# Altium PCB 2led_v2.PcbDoc (part 2 of 2)
Units mm, origin at the board's own origin, x right, y up, seen from the top; angles counter-clockwise.
Board outline 100 x 100 mm, 2 copper layers (Top Layer, Bottom Layer); 180 components, 8 nets, 419 pads, 0 vias.
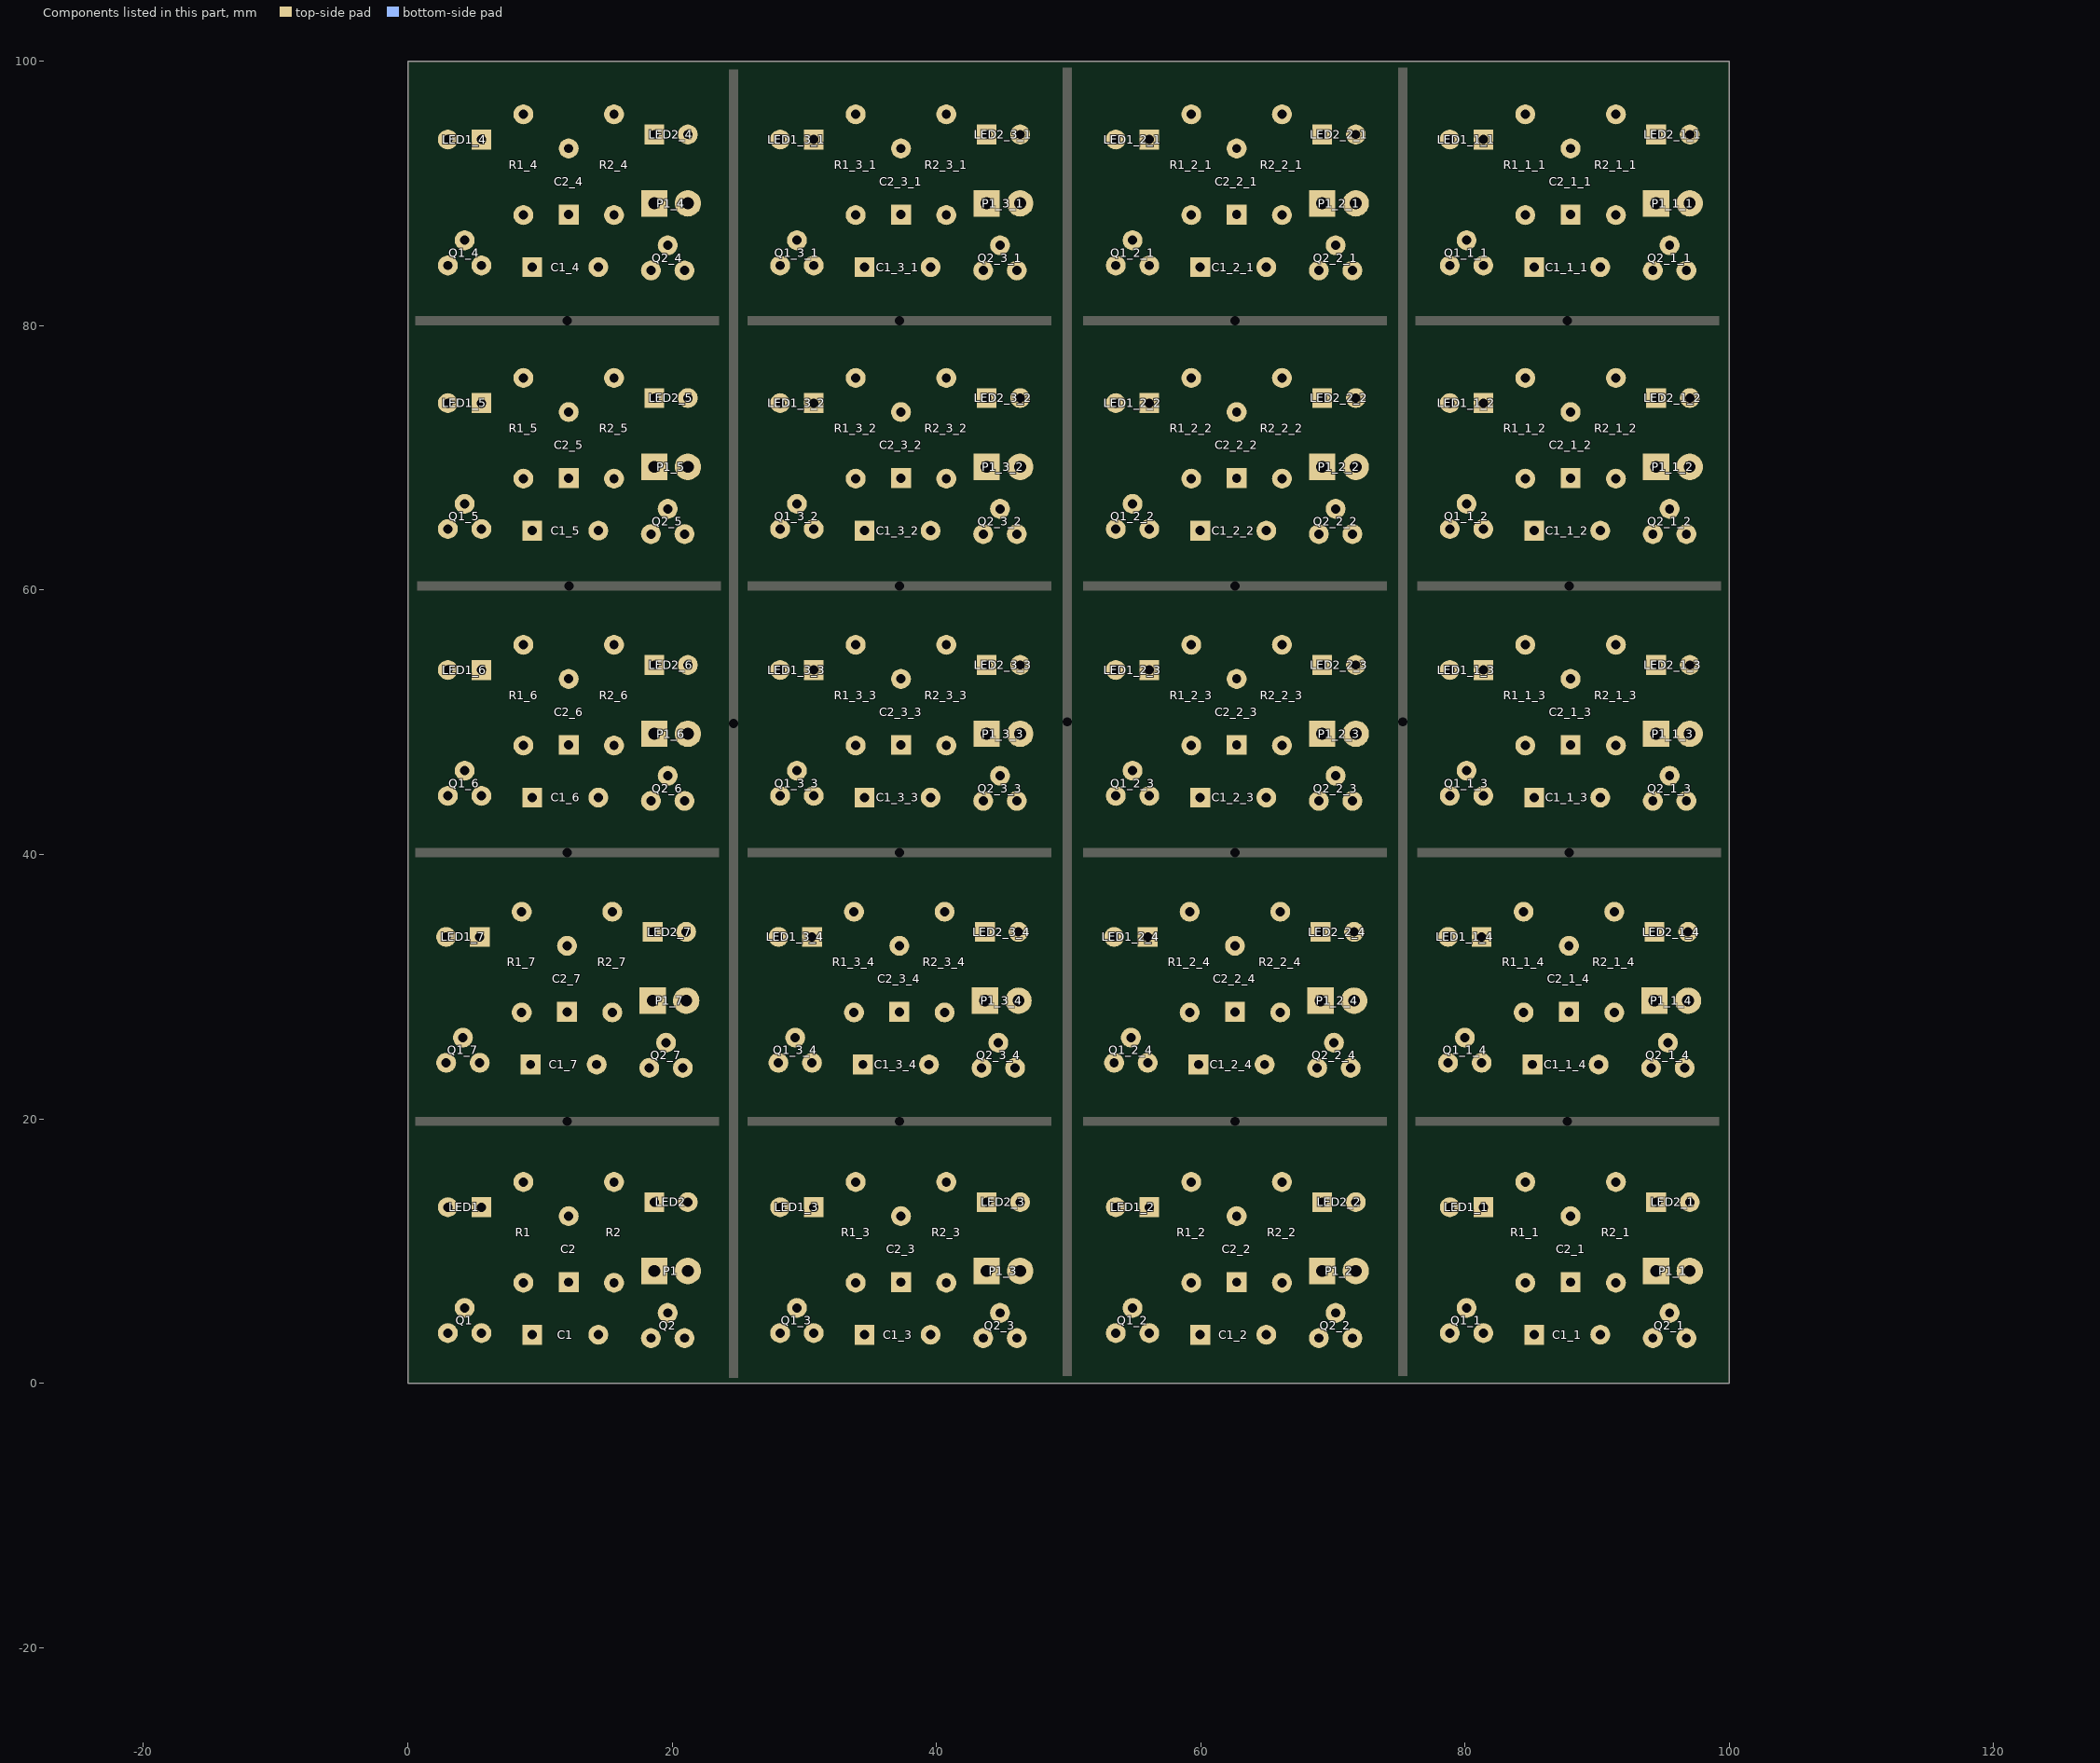
[diagram p2: the components of this part, seen from the top]

## Nets (pads, with @x,y where several pads share a name; then routed paths per layer and width w, separated by ;. In a path a pad name is that pad's centre, name@x,y a point inside that pad or via, vN(x,y) a via of type N, cw(c..) or ccw(c..) an arc to the next point about the centre after c; other vN are vias at no path point) (continued)
copper on no net: | length 2033.3
  Top Layer w0.254: -9.287,-24.4 -9.16,-24.4
  Top Layer w0.762: 5.445,24.241 6.588,24.241 8.747,22.082 19.034,22.082 20.812,23.86 ; 5.572,44.434 6.715,44.434 8.874,42.275 19.161,42.275 20.939,44.053 ; 5.572,64.627 6.715,64.627 8.874,62.468 19.161,62.468 20.939,64.246 ; 5.572,84.566 6.715,84.566 8.874,82.407 19.161,82.407 20.939,84.185 ; 12.049,28.091 12.898,28.091 17.129,23.86 18.272,23.86 ; 12.176,48.284 13.025,48.284 17.256,44.053 18.399,44.053 ; 12.176,68.477 13.025,68.477 17.256,64.246 18.399,64.246 ; 12.176,88.416 13.025,88.416 17.256,84.185 18.399,84.185 ; 30.591,24.241 31.734,24.241 33.893,22.082 44.18,22.082 45.958,23.86 ; 30.718,3.794 31.861,3.794 34.02,1.635 44.307,1.635 46.085,3.413 ; 30.718,44.434 31.861,44.434 34.02,42.275 44.307,42.275 46.085,44.053 ; 30.718,64.627 31.861,64.627 34.02,62.468 44.307,62.468 46.085,64.246 ; 30.718,84.566 31.861,84.566 34.02,82.407 44.307,82.407 46.085,84.185 ; 37.195,28.091 38.044,28.091 42.275,23.86 43.418,23.86 ; 37.322,7.644 38.171,7.644 42.402,3.413 43.545,3.413 ; 37.322,48.284 38.171,48.284 42.402,44.053 43.545,44.053 ; 37.322,68.477 38.171,68.477 42.402,64.246 43.545,64.246 ; 37.322,88.416 38.171,88.416 42.402,84.185 43.545,84.185 ; 55.991,24.241 57.134,24.241 59.293,22.082 69.58,22.082 71.358,23.86 ; 56.118,3.794 57.261,3.794 59.42,1.635 69.707,1.635 71.485,3.413 ; 56.118,44.434 57.261,44.434 59.42,42.275 69.707,42.275 71.485,44.053 ; 56.118,64.627 57.261,64.627 59.42,62.468 69.707,62.468 71.485,64.246 ; 56.118,84.566 57.261,84.566 59.42,82.407 69.707,82.407 71.485,84.185 ; 62.595,28.091 63.444,28.091 67.675,23.86 68.818,23.86 ; 62.722,7.644 63.571,7.644 67.802,3.413 68.945,3.413 ; 62.722,48.284 63.571,48.284 67.802,44.053 68.945,44.053 ; 62.722,68.477 63.571,68.477 67.802,64.246 68.945,64.246 ; 62.722,88.416 63.571,88.416 67.802,84.185 68.945,84.185 ; 81.264,24.241 82.407,24.241 84.566,22.082 94.853,22.082 96.631,23.86 ; 81.391,3.794 82.534,3.794 84.693,1.635 94.98,1.635 96.758,3.413 ; 81.391,44.434 82.534,44.434 84.693,42.275 94.98,42.275 96.758,44.053 ; 81.391,64.627 82.534,64.627 84.693,62.468 94.98,62.468 96.758,64.246 ; 81.391,84.566 82.534,84.566 84.693,82.407 94.98,82.407 96.758,84.185 ; 87.868,28.091 88.717,28.091 92.948,23.86 94.091,23.86 ; 87.995,7.644 88.844,7.644 93.075,3.413 94.218,3.413 ; 87.995,48.284 88.844,48.284 93.075,44.053 94.218,44.053 ; 87.995,68.477 88.844,68.477 93.075,64.246 94.218,64.246 ; 87.995,88.416 88.844,88.416 93.075,84.185 94.218,84.185
  Bottom Layer w0.762: 2.905,33.766 2.905,28.813 2.016,27.924 2.016,25.13 2.905,24.241 4.429,22.717 8.112,22.717 9.295,23.9 9.295,24.114 ; 3.032,53.959 3.032,49.006 2.143,48.117 2.143,45.323 3.032,44.434 4.556,42.91 8.239,42.91 9.422,44.093 9.422,44.307 ; 3.032,74.152 3.032,69.199 2.143,68.31 2.143,65.516 3.032,64.627 4.556,63.103 8.239,63.103 9.422,64.286 9.422,64.5 ; 3.032,94.091 3.032,89.138 2.143,88.249 2.143,85.455 3.032,84.566 4.556,83.042 8.239,83.042 9.422,84.225 9.422,84.439 ; 4.175,26.146 6.715,26.146 8.62,28.051 12.049,31.48 12.049,33.091 ; 4.302,46.339 6.842,46.339 8.747,48.244 12.176,51.673 12.176,53.284 ; 4.302,66.532 6.842,66.532 8.747,68.437 12.176,71.866 12.176,73.477 ; 4.302,86.471 6.842,86.471 8.747,88.376 12.176,91.805 12.176,93.416 ; 5.445,33.766 6.715,33.766 8.62,35.671 15.478,35.671 17.002,35.671 18.526,34.147 18.526,28.94 ; 5.572,53.959 6.842,53.959 8.747,55.864 15.605,55.864 17.129,55.864 18.653,54.34 18.653,49.133 ; 5.572,74.152 6.842,74.152 8.747,76.057 15.605,76.057 17.129,76.057 18.653,74.533 18.653,69.326 ; 5.572,94.091 6.842,94.091 8.747,95.996 15.605,95.996 17.129,95.996 18.653,94.472 18.653,89.265 ; 14.295,24.114 14.295,26.868 15.478,28.051 15.605,28.051 17.891,25.765 19.542,25.765 ; 14.422,44.307 14.422,47.061 15.605,48.244 15.732,48.244 18.018,45.958 19.669,45.958 ; 14.422,64.5 14.422,67.254 15.605,68.437 15.732,68.437 18.018,66.151 19.669,66.151 ; 14.422,84.439 14.422,87.193 15.605,88.376 15.732,88.376 18.018,86.09 19.669,86.09 ; 18.272,23.86 20.304,21.828 22.082,21.828 22.844,22.59 22.844,30.21 21.066,31.988 21.066,34.147 ; 18.399,44.053 20.431,42.021 22.209,42.021 22.971,42.783 22.971,50.403 21.193,52.181 21.193,54.34 ; 18.399,64.246 20.431,62.214 22.209,62.214 22.971,62.976 22.971,70.596 21.193,72.374 21.193,74.533 ; 18.399,84.185 20.431,82.153 22.209,82.153 22.971,82.915 22.971,90.535 21.193,92.313 21.193,94.472 ; 20.812,23.86 21.066,24.114 21.066,28.94 ; 20.939,44.053 21.193,44.307 21.193,49.133 ; 20.939,64.246 21.193,64.5 21.193,69.326 ; 20.939,84.185 21.193,84.439 21.193,89.265 ; 28.051,33.766 28.051,28.813 27.162,27.924 27.162,25.13 28.051,24.241 29.575,22.717 33.258,22.717 34.441,23.9 34.441,24.114 ; 28.178,13.319 28.178,8.366 27.289,7.477 27.289,4.683 28.178,3.794 29.702,2.27 33.385,2.27 34.568,3.453 34.568,3.667 ; 28.178,53.959 28.178,49.006 27.289,48.117 27.289,45.323 28.178,44.434 29.702,42.91 33.385,42.91 34.568,44.093 34.568,44.307 ; 28.178,74.152 28.178,69.199 27.289,68.31 27.289,65.516 28.178,64.627 29.702,63.103 33.385,63.103 34.568,64.286 34.568,64.5 ; 28.178,94.091 28.178,89.138 27.289,88.249 27.289,85.455 28.178,84.566 29.702,83.042 33.385,83.042 34.568,84.225 34.568,84.439 ; 29.321,26.146 31.861,26.146 33.766,28.051 37.195,31.48 37.195,33.091 ; 29.448,5.699 31.988,5.699 33.893,7.604 37.322,11.033 37.322,12.644 ; 29.448,46.339 31.988,46.339 33.893,48.244 37.322,51.673 37.322,53.284 ; 29.448,66.532 31.988,66.532 33.893,68.437 37.322,71.866 37.322,73.477 ; 29.448,86.471 31.988,86.471 33.893,88.376 37.322,91.805 37.322,93.416 ; 30.591,33.766 31.861,33.766 33.766,35.671 40.624,35.671 42.148,35.671 43.672,34.147 43.672,28.94 ; 30.718,13.319 31.988,13.319 33.893,15.224 40.751,15.224 42.275,15.224 43.799,13.7 43.799,8.493 ; 30.718,53.959 31.988,53.959 33.893,55.864 40.751,55.864 42.275,55.864 43.799,54.34 43.799,49.133 ; 30.718,74.152 31.988,74.152 33.893,76.057 40.751,76.057 42.275,76.057 43.799,74.533 43.799,69.326 ; 30.718,94.091 31.988,94.091 33.893,95.996 40.751,95.996 42.275,95.996 43.799,94.472 43.799,89.265 ; 39.441,24.114 39.441,26.868 40.624,28.051 40.751,28.051 43.037,25.765 44.688,25.765 ; 39.568,3.667 39.568,6.421 40.751,7.604 40.878,7.604 43.164,5.318 44.815,5.318 ; 39.568,44.307 39.568,47.061 40.751,48.244 40.878,48.244 43.164,45.958 44.815,45.958 ; 39.568,64.5 39.568,67.254 40.751,68.437 40.878,68.437 43.164,66.151 44.815,66.151 ; 39.568,84.439 39.568,87.193 40.751,88.376 40.878,88.376 43.164,86.09 44.815,86.09 ; 43.418,23.86 45.45,21.828 47.228,21.828 47.99,22.59 47.99,30.21 46.212,31.988 46.212,34.147 ; 43.545,3.413 45.577,1.381 47.355,1.381 48.117,2.143 48.117,9.763 46.339,11.541 46.339,13.7 ; 43.545,44.053 45.577,42.021 47.355,42.021 48.117,42.783 48.117,50.403 46.339,52.181 46.339,54.34 ; 43.545,64.246 45.577,62.214 47.355,62.214 48.117,62.976 48.117,70.596 46.339,72.374 46.339,74.533 ; 43.545,84.185 45.577,82.153 47.355,82.153 48.117,82.915 48.117,90.535 46.339,92.313 46.339,94.472 ; 45.958,23.86 46.212,24.114 46.212,28.94 ; 46.085,3.413 46.339,3.667 46.339,8.493 ; 46.085,44.053 46.339,44.307 46.339,49.133 ; 46.085,64.246 46.339,64.5 46.339,69.326 ; 46.085,84.185 46.339,84.439 46.339,89.265 ; 53.451,33.766 53.451,28.813 52.562,27.924 52.562,25.13 53.451,24.241 54.975,22.717 58.658,22.717 59.841,23.9 59.841,24.114 ; 53.578,13.319 53.578,8.366 52.689,7.477 52.689,4.683 53.578,3.794 55.102,2.27 58.785,2.27 59.968,3.453 59.968,3.667 ; 53.578,53.959 53.578,49.006 52.689,48.117 52.689,45.323 53.578,44.434 55.102,42.91 58.785,42.91 59.968,44.093 59.968,44.307 ; 53.578,74.152 53.578,69.199 52.689,68.31 52.689,65.516 53.578,64.627 55.102,63.103 58.785,63.103 59.968,64.286 59.968,64.5 ; 53.578,94.091 53.578,89.138 52.689,88.249 52.689,85.455 53.578,84.566 55.102,83.042 58.785,83.042 59.968,84.225 59.968,84.439 ; 54.721,26.146 57.261,26.146 59.166,28.051 62.595,31.48 62.595,33.091 ; 54.848,5.699 57.388,5.699 59.293,7.604 62.722,11.033 62.722,12.644 ; 54.848,46.339 57.388,46.339 59.293,48.244 62.722,51.673 62.722,53.284 ; 54.848,66.532 57.388,66.532 59.293,68.437 62.722,71.866 62.722,73.477 ; 54.848,86.471 57.388,86.471 59.293,88.376 62.722,91.805 62.722,93.416 ; 55.991,33.766 57.261,33.766 59.166,35.671 66.024,35.671 67.548,35.671 69.072,34.147 69.072,28.94 ; 56.118,13.319 57.388,13.319 59.293,15.224 66.151,15.224 67.675,15.224 69.199,13.7 69.199,8.493 ; 56.118,53.959 57.388,53.959 59.293,55.864 66.151,55.864 67.675,55.864 69.199,54.34 69.199,49.133 ; 56.118,74.152 57.388,74.152 59.293,76.057 66.151,76.057 67.675,76.057 69.199,74.533 69.199,69.326 ; 56.118,94.091 57.388,94.091 59.293,95.996 66.151,95.996 67.675,95.996 69.199,94.472 69.199,89.265 ; 64.841,24.114 64.841,26.868 66.024,28.051 66.151,28.051 68.437,25.765 70.088,25.765 ; 64.968,3.667 64.968,6.421 66.151,7.604 66.278,7.604 68.564,5.318 70.215,5.318 ; 64.968,44.307 64.968,47.061 66.151,48.244 66.278,48.244 68.564,45.958 70.215,45.958 ; 64.968,64.5 64.968,67.254 66.151,68.437 66.278,68.437 68.564,66.151 70.215,66.151 ; 64.968,84.439 64.968,87.193 66.151,88.376 66.278,88.376 68.564,86.09 70.215,86.09 ; 68.818,23.86 70.85,21.828 72.628,21.828 73.39,22.59 73.39,30.21 71.612,31.988 71.612,34.147 ; 68.945,3.413 70.977,1.381 72.755,1.381 73.517,2.143 73.517,9.763 71.739,11.541 71.739,13.7 ; 68.945,44.053 70.977,42.021 72.755,42.021 73.517,42.783 73.517,50.403 71.739,52.181 71.739,54.34 ; 68.945,64.246 70.977,62.214 72.755,62.214 73.517,62.976 73.517,70.596 71.739,72.374 71.739,74.533 ; 68.945,84.185 70.977,82.153 72.755,82.153 73.517,82.915 73.517,90.535 71.739,92.313 71.739,94.472 ; 71.358,23.86 71.612,24.114 71.612,28.94 ; 71.485,3.413 71.739,3.667 71.739,8.493 ; 71.485,44.053 71.739,44.307 71.739,49.133 ; 71.485,64.246 71.739,64.5 71.739,69.326 ; 71.485,84.185 71.739,84.439 71.739,89.265 ; 78.724,33.766 78.724,28.813 77.835,27.924 77.835,25.13 78.724,24.241 80.248,22.717 83.931,22.717 85.114,23.9 85.114,24.114 ; 78.851,13.319 78.851,8.366 77.962,7.477 77.962,4.683 78.851,3.794 80.375,2.27 84.058,2.27 85.241,3.453 85.241,3.667 ; 78.851,53.959 78.851,49.006 77.962,48.117 77.962,45.323 78.851,44.434 80.375,42.91 84.058,42.91 85.241,44.093 85.241,44.307 ; 78.851,74.152 78.851,69.199 77.962,68.31 77.962,65.516 78.851,64.627 80.375,63.103 84.058,63.103 85.241,64.286 85.241,64.5 ; 78.851,94.091 78.851,89.138 77.962,88.249 77.962,85.455 78.851,84.566 80.375,83.042 84.058,83.042 85.241,84.225 85.241,84.439 ; 79.994,26.146 82.534,26.146 84.439,28.051 87.868,31.48 87.868,33.091 ; 80.121,5.699 82.661,5.699 84.566,7.604 87.995,11.033 87.995,12.644 ; 80.121,46.339 82.661,46.339 84.566,48.244 87.995,51.673 87.995,53.284 ; 80.121,66.532 82.661,66.532 84.566,68.437 87.995,71.866 87.995,73.477 ; 80.121,86.471 82.661,86.471 84.566,88.376 87.995,91.805 87.995,93.416 ; 81.264,33.766 82.534,33.766 84.439,35.671 91.297,35.671 92.821,35.671 94.345,34.147 94.345,28.94 ; 81.391,13.319 82.661,13.319 84.566,15.224 91.424,15.224 92.948,15.224 94.472,13.7 94.472,8.493 ; 81.391,53.959 82.661,53.959 84.566,55.864 91.424,55.864 92.948,55.864 94.472,54.34 94.472,49.133 ; 81.391,74.152 82.661,74.152 84.566,76.057 91.424,76.057 92.948,76.057 94.472,74.533 94.472,69.326 ; 81.391,94.091 82.661,94.091 84.566,95.996 91.424,95.996 92.948,95.996 94.472,94.472 94.472,89.265 ; 90.114,24.114 90.114,26.868 91.297,28.051 91.424,28.051 93.71,25.765 95.361,25.765 ; 90.241,3.667 90.241,6.421 91.424,7.604 91.551,7.604 93.837,5.318 95.488,5.318 ; 90.241,44.307 90.241,47.061 91.424,48.244 91.551,48.244 93.837,45.958 95.488,45.958 ; 90.241,64.5 90.241,67.254 91.424,68.437 91.551,68.437 93.837,66.151 95.488,66.151 ; 90.241,84.439 90.241,87.193 91.424,88.376 91.551,88.376 93.837,86.09 95.488,86.09 ; 94.091,23.86 96.123,21.828 97.901,21.828 98.663,22.59 98.663,30.21 96.885,31.988 96.885,34.147 ; 94.218,3.413 96.25,1.381 98.028,1.381 98.79,2.143 98.79,9.763 97.012,11.541 97.012,13.7 ; 94.218,44.053 96.25,42.021 98.028,42.021 98.79,42.783 98.79,50.403 97.012,52.181 97.012,54.34 ; 94.218,64.246 96.25,62.214 98.028,62.214 98.79,62.976 98.79,70.596 97.012,72.374 97.012,74.533 ; 94.218,84.185 96.25,82.153 98.028,82.153 98.79,82.915 98.79,90.535 97.012,92.313 97.012,94.472 ; 96.631,23.86 96.885,24.114 96.885,28.94 ; 96.758,3.413 97.012,3.667 97.012,8.493 ; 96.758,44.053 97.012,44.307 97.012,49.133 ; 96.758,64.246 97.012,64.5 97.012,69.326 ; 96.758,84.185 97.012,84.439 97.012,89.265

## Keep-outs
Keep-Out Layer:
  lines w0.254: 0,0 100.076,0 100.076,100.203 0,100.203 0,0

## Silkscreen, mask and mechanical layers (free items; w line width, h text height)
Top Overlay:
  lines w0.254: 0.238,20.812 0.238,39.227 23.733,39.227 23.733,20.812 0.238,20.812 ; 0.365,0.365 23.86,0.365 23.86,18.78 0.365,18.78 0.365,0.365 ; 0.365,41.005 0.365,59.42 23.86,59.42 23.86,41.005 0.365,41.005 ; 0.365,61.198 0.365,79.613 23.86,79.613 23.86,61.198 0.365,61.198 ; 0.365,81.137 0.365,99.552 23.86,99.552 23.86,81.137 0.365,81.137 ; 25.384,20.812 48.879,20.812 48.879,39.227 25.384,39.227 25.384,20.812 ; 25.511,0.365 25.511,18.78 49.006,18.78 49.006,0.365 25.511,0.365 ; 25.511,41.005 49.006,41.005 49.006,59.42 25.511,59.42 25.511,41.005 ; 25.511,61.198 49.006,61.198 49.006,79.613 25.511,79.613 25.511,61.198 ; 25.511,81.137 49.006,81.137 49.006,99.552 25.511,99.552 25.511,81.137 ; 50.784,20.812 74.279,20.812 74.279,39.227 50.784,39.227 50.784,20.812 ; 50.911,0.365 50.911,18.78 74.406,18.78 74.406,0.365 50.911,0.365 ; 50.911,41.005 74.406,41.005 74.406,59.42 50.911,59.42 50.911,41.005 ; 50.911,61.198 74.406,61.198 74.406,79.613 50.911,79.613 50.911,61.198 ; 50.911,81.137 74.406,81.137 74.406,99.552 50.911,99.552 50.911,81.137 ; 76.057,20.812 99.552,20.812 99.552,39.227 76.057,39.227 76.057,20.812 ; 76.184,0.365 76.184,18.78 99.679,18.78 99.679,0.365 76.184,0.365 ; 76.184,41.005 99.679,41.005 99.679,59.42 76.184,59.42 76.184,41.005 ; 76.184,61.198 99.679,61.198 99.679,79.613 76.184,79.613 76.184,61.198 ; 76.184,81.137 99.679,81.137 99.679,99.552 76.184,99.552 76.184,81.137
  text "LED" at 18.907,97.901 h1
  text "LED" at 44.053,97.901 h1
  text "LED" at 69.453,97.901 h1
  text "LED" at 94.726,97.901 h1
  text "A.I. PCB" at 8.874,97.647 h1
  text "A.I. PCB" at 34.02,97.647 h1
  text "A.I. PCB" at 59.42,97.647 h1
  text "A.I. PCB" at 84.693,97.647 h1
  text "LED" at 2.778,97.52 h1
  text "LED" at 27.924,97.52 h1
  text "LED" at 53.324,97.52 h1
  text "LED" at 78.597,97.52 h1
  text "+" at 18.399,95.615 h1
  text "+" at 43.545,95.615 h1
  text "+" at 68.945,95.615 h1
  text "+" at 94.218,95.615 h1
  text "-" at 20.812,95.488 h1
  text "-" at 45.958,95.488 h1
  text "-" at 71.358,95.488 h1
  text "-" at 96.631,95.488 h1
  text "+" at 5.191,95.107 h1
  text "+" at 30.337,95.107 h1
  text "+" at 55.737,95.107 h1
  text "+" at 81.01,95.107 h1
  text "-" at 3.413,94.98 h1
  text "-" at 28.559,94.98 h1
  text "-" at 53.959,94.98 h1
  text "-" at 79.232,94.98 h1
  text "-" at 11.668,91.932 h1
  text "-" at 36.814,91.932 h1
  text "-" at 62.214,91.932 h1
  text "-" at 87.487,91.932 h1
  text "33K" at 16.113,91.424 h1 r90
  text "33K" at 41.259,91.424 h1 r90
  text "33K" at 66.659,91.424 h1 r90
  text "33K" at 91.932,91.424 h1 r90
  text "33K" at 9.255,91.043 h1 r90
  text "33K" at 34.401,91.043 h1 r90
  text "33K" at 59.801,91.043 h1 r90
  text "33K" at 85.074,91.043 h1 r90
  text "+" at 17.51,90.662 h1
  text "+" at 42.656,90.662 h1
  text "+" at 68.056,90.662 h1
  text "+" at 93.329,90.662 h1
  text "100U" at 10.779,90.535 h0.8
  text "100U" at 35.925,90.535 h0.8
  text "100U" at 61.325,90.535 h0.8
  text "100U" at 86.598,90.535 h0.8
  text "-" at 21.193,90.408 h1
  text "-" at 46.339,90.408 h1
  text "-" at 71.739,90.408 h1
  text "-" at 97.012,90.408 h1
  text "+" at 11.922,89.265 h1
  text "+" at 37.068,89.265 h1
  text "+" at 62.468,89.265 h1
  text "+" at 87.741,89.265 h1
  text "3V" at 21.574,86.598 h1
  text "3V" at 46.72,86.598 h1
  text "3V" at 72.12,86.598 h1
  text "3V" at 97.393,86.598 h1
  text "100U" at 10.652,84.82 h0.8
  text "100U" at 35.798,84.82 h0.8
  text "100U" at 61.198,84.82 h0.8
  text "100U" at 86.471,84.82 h0.8
  text "+" at 10.652,83.931 h1
  text "-" at 12.557,83.931 h1
  text "+" at 35.798,83.931 h1
  text "-" at 37.703,83.931 h1
  text "+" at 61.198,83.931 h1
  text "-" at 63.103,83.931 h1
  text "+" at 86.471,83.931 h1
  text "-" at 88.376,83.931 h1
  text "2N2222" at 1.381,81.518 h1
  text "2N2222" at 16.621,81.518 h1
  text "2N2222" at 26.527,81.518 h1
  text "2N2222" at 41.767,81.518 h1
  text "2N2222" at 51.927,81.518 h1
  text "2N2222" at 67.167,81.518 h1
  text "2N2222" at 77.2,81.518 h1
  text "2N2222" at 92.44,81.518 h1
  text "LED" at 18.907,77.962 h1
  text "LED" at 44.053,77.962 h1
  text "LED" at 69.453,77.962 h1
  text "LED" at 94.726,77.962 h1
  text "A.I. PCB" at 8.874,77.708 h1
  text "A.I. PCB" at 34.02,77.708 h1
  text "A.I. PCB" at 59.42,77.708 h1
  text "A.I. PCB" at 84.693,77.708 h1
  text "LED" at 2.778,77.581 h1
  text "LED" at 27.924,77.581 h1
  text "LED" at 53.324,77.581 h1
  text "LED" at 78.597,77.581 h1
  text "+" at 18.399,75.676 h1
  text "+" at 43.545,75.676 h1
  text "+" at 68.945,75.676 h1
  text "+" at 94.218,75.676 h1
  text "-" at 20.812,75.549 h1
  text "-" at 45.958,75.549 h1
  text "-" at 71.358,75.549 h1
  text "-" at 96.631,75.549 h1
  text "+" at 5.191,75.168 h1
  text "+" at 30.337,75.168 h1
  text "+" at 55.737,75.168 h1
  text "+" at 81.01,75.168 h1
  text "-" at 3.413,75.041 h1
  text "-" at 28.559,75.041 h1
  text "-" at 53.959,75.041 h1
  text "-" at 79.232,75.041 h1
  text "-" at 11.668,71.993 h1
  text "-" at 36.814,71.993 h1
  text "-" at 62.214,71.993 h1
  text "-" at 87.487,71.993 h1
  text "33K" at 16.113,71.485 h1 r90
  text "33K" at 41.259,71.485 h1 r90
  text "33K" at 66.659,71.485 h1 r90
  text "33K" at 91.932,71.485 h1 r90
  text "33K" at 9.255,71.104 h1 r90
  text "33K" at 34.401,71.104 h1 r90
  text "33K" at 59.801,71.104 h1 r90
  text "33K" at 85.074,71.104 h1 r90
  text "+" at 17.51,70.723 h1
  text "+" at 42.656,70.723 h1
  text "+" at 68.056,70.723 h1
  text "+" at 93.329,70.723 h1
  text "100U" at 10.779,70.596 h0.8
  text "100U" at 35.925,70.596 h0.8
  text "100U" at 61.325,70.596 h0.8
  text "100U" at 86.598,70.596 h0.8
  text "-" at 21.193,70.469 h1
  text "-" at 46.339,70.469 h1
  text "-" at 71.739,70.469 h1
  text "-" at 97.012,70.469 h1
  text "+" at 11.922,69.326 h1
  text "+" at 37.068,69.326 h1
  text "+" at 62.468,69.326 h1
  text "+" at 87.741,69.326 h1
  text "3V" at 21.574,66.659 h1
  text "3V" at 46.72,66.659 h1
  text "3V" at 72.12,66.659 h1
  text "3V" at 97.393,66.659 h1
  text "100U" at 10.652,64.881 h0.8
  text "100U" at 35.798,64.881 h0.8
  text "100U" at 61.198,64.881 h0.8
  text "100U" at 86.471,64.881 h0.8
  text "+" at 10.652,63.992 h1
  text "-" at 12.557,63.992 h1
  text "+" at 35.798,63.992 h1
  text "-" at 37.703,63.992 h1
  text "+" at 61.198,63.992 h1
  text "-" at 63.103,63.992 h1
  text "+" at 86.471,63.992 h1
  text "-" at 88.376,63.992 h1
  text "2N2222" at 1.381,61.579 h1
  text "2N2222" at 16.621,61.579 h1
  text "2N2222" at 26.527,61.579 h1
  text "2N2222" at 41.767,61.579 h1
  text "2N2222" at 51.927,61.579 h1
  text "2N2222" at 67.167,61.579 h1
  text "2N2222" at 77.2,61.579 h1
  text "2N2222" at 92.44,61.579 h1
  text "LED" at 18.907,57.769 h1
  text "LED" at 44.053,57.769 h1
  text "LED" at 69.453,57.769 h1
  text "LED" at 94.726,57.769 h1
  text "A.I. PCB" at 8.874,57.515 h1
  text "A.I. PCB" at 34.02,57.515 h1
  text "A.I. PCB" at 59.42,57.515 h1
  text "A.I. PCB" at 84.693,57.515 h1
  text "LED" at 2.778,57.388 h1
  text "LED" at 27.924,57.388 h1
  text "LED" at 53.324,57.388 h1
  text "LED" at 78.597,57.388 h1
  text "+" at 18.399,55.483 h1
  text "+" at 43.545,55.483 h1
  text "+" at 68.945,55.483 h1
  text "+" at 94.218,55.483 h1
  text "-" at 20.812,55.356 h1
  text "-" at 45.958,55.356 h1
  text "-" at 71.358,55.356 h1
  text "-" at 96.631,55.356 h1
  text "+" at 5.191,54.975 h1
  text "+" at 30.337,54.975 h1
  text "+" at 55.737,54.975 h1
  text "+" at 81.01,54.975 h1
  text "-" at 3.413,54.848 h1
  text "-" at 28.559,54.848 h1
  text "-" at 53.959,54.848 h1
  text "-" at 79.232,54.848 h1
  text "-" at 11.668,51.8 h1
  text "-" at 36.814,51.8 h1
  text "-" at 62.214,51.8 h1
  text "-" at 87.487,51.8 h1
  text "33K" at 16.113,51.292 h1 r90
  text "33K" at 41.259,51.292 h1 r90
  text "33K" at 66.659,51.292 h1 r90
  text "33K" at 91.932,51.292 h1 r90
  text "33K" at 9.255,50.911 h1 r90
  text "33K" at 34.401,50.911 h1 r90
  text "33K" at 59.801,50.911 h1 r90
  text "33K" at 85.074,50.911 h1 r90
  text "+" at 17.51,50.53 h1
  text "+" at 42.656,50.53 h1
  text "+" at 68.056,50.53 h1
  text "+" at 93.329,50.53 h1
  text "100U" at 10.779,50.403 h0.8
  text "100U" at 35.925,50.403 h0.8
  text "100U" at 61.325,50.403 h0.8
  text "100U" at 86.598,50.403 h0.8
  text "-" at 21.193,50.276 h1
  text "-" at 46.339,50.276 h1
  text "-" at 71.739,50.276 h1
  text "-" at 97.012,50.276 h1
  text "+" at 11.922,49.133 h1
  text "+" at 37.068,49.133 h1
  text "+" at 62.468,49.133 h1
  text "+" at 87.741,49.133 h1
  text "3V" at 21.574,46.466 h1
  text "3V" at 46.72,46.466 h1
  text "3V" at 72.12,46.466 h1
  text "3V" at 97.393,46.466 h1
  text "100U" at 10.652,44.688 h0.8
  text "100U" at 35.798,44.688 h0.8
  text "100U" at 61.198,44.688 h0.8
  text "100U" at 86.471,44.688 h0.8
  text "+" at 10.652,43.799 h1
  text "-" at 12.557,43.799 h1
  text "+" at 35.798,43.799 h1
  text "-" at 37.703,43.799 h1
  text "+" at 61.198,43.799 h1
  text "-" at 63.103,43.799 h1
  text "+" at 86.471,43.799 h1
  text "-" at 88.376,43.799 h1
  text "2N2222" at 1.381,41.386 h1
  text "2N2222" at 16.621,41.386 h1
  text "2N2222" at 26.527,41.386 h1
  text "2N2222" at 41.767,41.386 h1
  text "2N2222" at 51.927,41.386 h1
  text "2N2222" at 67.167,41.386 h1
  text "2N2222" at 77.2,41.386 h1
  text "2N2222" at 92.44,41.386 h1
  text "LED" at 18.78,37.576 h1
  text "LED" at 43.926,37.576 h1
  text "LED" at 69.326,37.576 h1
  text "LED" at 94.599,37.576 h1
  text "A.I. PCB" at 8.747,37.322 h1
  text "A.I. PCB" at 33.893,37.322 h1
  text "A.I. PCB" at 59.293,37.322 h1
  text "A.I. PCB" at 84.566,37.322 h1
  text "LED" at 2.651,37.195 h1
  text "LED" at 27.797,37.195 h1
  text "LED" at 53.197,37.195 h1
  text "LED" at 78.47,37.195 h1
  text "+" at 18.272,35.29 h1
  text "+" at 43.418,35.29 h1
  text "+" at 68.818,35.29 h1
  text "+" at 94.091,35.29 h1
  text "-" at 20.685,35.163 h1
  text "-" at 45.831,35.163 h1
  text "-" at 71.231,35.163 h1
  text "-" at 96.504,35.163 h1
  text "+" at 5.064,34.782 h1
  text "+" at 30.21,34.782 h1
  text "+" at 55.61,34.782 h1
  text "+" at 80.883,34.782 h1
  text "-" at 3.286,34.655 h1
  text "-" at 28.432,34.655 h1
  text "-" at 53.832,34.655 h1
  text "-" at 79.105,34.655 h1
  text "-" at 11.541,31.607 h1
  text "-" at 36.687,31.607 h1
  text "-" at 62.087,31.607 h1
  text "-" at 87.36,31.607 h1
  text "33K" at 15.986,31.099 h1 r90
  text "33K" at 41.132,31.099 h1 r90
  text "33K" at 66.532,31.099 h1 r90
  text "33K" at 91.805,31.099 h1 r90
  text "33K" at 9.128,30.718 h1 r90
  text "33K" at 34.274,30.718 h1 r90
  text "33K" at 59.674,30.718 h1 r90
  text "33K" at 84.947,30.718 h1 r90
  text "+" at 17.383,30.337 h1
  text "+" at 42.529,30.337 h1
  text "+" at 67.929,30.337 h1
  text "+" at 93.202,30.337 h1
  text "100U" at 10.652,30.21 h0.8
  text "100U" at 35.798,30.21 h0.8
  text "100U" at 61.198,30.21 h0.8
  text "100U" at 86.471,30.21 h0.8
  text "-" at 21.066,30.083 h1
  text "-" at 46.212,30.083 h1
  text "-" at 71.612,30.083 h1
  text "-" at 96.885,30.083 h1
  text "+" at 11.795,28.94 h1
  text "+" at 36.941,28.94 h1
  text "+" at 62.341,28.94 h1
  text "+" at 87.614,28.94 h1
  text "3V" at 21.447,26.273 h1
  text "3V" at 46.593,26.273 h1
  text "3V" at 71.993,26.273 h1
  text "3V" at 97.266,26.273 h1
  text "100U" at 10.525,24.495 h0.8
  text "100U" at 35.671,24.495 h0.8
  text "100U" at 61.071,24.495 h0.8
  text "100U" at 86.344,24.495 h0.8
  text "+" at 10.525,23.606 h1
  text "-" at 12.43,23.606 h1
  text "+" at 35.671,23.606 h1
  text "-" at 37.576,23.606 h1
  text "+" at 61.071,23.606 h1
  text "-" at 62.976,23.606 h1
  text "+" at 86.344,23.606 h1
  text "-" at 88.249,23.606 h1
  text "2N2222" at 1.254,21.193 h1
  text "2N2222" at 16.494,21.193 h1
  text "2N2222" at 26.4,21.193 h1
  text "2N2222" at 41.64,21.193 h1
  text "2N2222" at 51.8,21.193 h1
  text "2N2222" at 67.04,21.193 h1
  text "2N2222" at 77.073,21.193 h1
  text "2N2222" at 92.313,21.193 h1
  text "LED" at 18.907,17.129 h1
  text "LED" at 44.053,17.129 h1
  text "LED" at 69.453,17.129 h1
  text "LED" at 94.726,17.129 h1
  text "A.I. PCB" at 8.874,16.875 h1
  text "A.I. PCB" at 34.02,16.875 h1
  text "A.I. PCB" at 59.42,16.875 h1
  text "A.I. PCB" at 84.693,16.875 h1
  text "LED" at 2.778,16.748 h1
  text "LED" at 27.924,16.748 h1
  text "LED" at 53.324,16.748 h1
  text "LED" at 78.597,16.748 h1
  text "+" at 18.399,14.843 h1
  text "+" at 43.545,14.843 h1
  text "+" at 68.945,14.843 h1
  text "+" at 94.218,14.843 h1
  text "-" at 20.812,14.716 h1
  text "-" at 45.958,14.716 h1
  text "-" at 71.358,14.716 h1
  text "-" at 96.631,14.716 h1
  text "+" at 5.191,14.335 h1
  text "+" at 30.337,14.335 h1
  text "+" at 55.737,14.335 h1
  text "+" at 81.01,14.335 h1
  text "-" at 3.413,14.208 h1
  text "-" at 28.559,14.208 h1
  text "-" at 53.959,14.208 h1
  text "-" at 79.232,14.208 h1
  text "-" at 11.668,11.16 h1
  text "-" at 36.814,11.16 h1
  text "-" at 62.214,11.16 h1
  text "-" at 87.487,11.16 h1
  text "33K" at 16.113,10.652 h1 r90
  text "33K" at 41.259,10.652 h1 r90
  text "33K" at 66.659,10.652 h1 r90
  text "33K" at 91.932,10.652 h1 r90
  text "33K" at 9.255,10.271 h1 r90
  text "33K" at 34.401,10.271 h1 r90
  text "33K" at 59.801,10.271 h1 r90
  text "33K" at 85.074,10.271 h1 r90
  text "+" at 17.51,9.89 h1
  text "+" at 42.656,9.89 h1
  text "+" at 68.056,9.89 h1
  text "+" at 93.329,9.89 h1
  text "100U" at 10.779,9.763 h0.8
  text "100U" at 35.925,9.763 h0.8
  text "100U" at 61.325,9.763 h0.8
  text "100U" at 86.598,9.763 h0.8
  text "-" at 21.193,9.636 h1
  text "-" at 46.339,9.636 h1
  text "-" at 71.739,9.636 h1
  text "-" at 97.012,9.636 h1
  text "+" at 11.922,8.493 h1
  text "+" at 37.068,8.493 h1
  text "+" at 62.468,8.493 h1
  text "+" at 87.741,8.493 h1
  text "3V" at 21.574,5.826 h1
  text "3V" at 46.72,5.826 h1
  text "3V" at 72.12,5.826 h1
  text "3V" at 97.393,5.826 h1
  text "100U" at 10.652,4.048 h0.8
  text "100U" at 35.798,4.048 h0.8
  text "100U" at 61.198,4.048 h0.8
  text "100U" at 86.471,4.048 h0.8
  text "+" at 10.652,3.159 h1
  text "-" at 12.557,3.159 h1
  text "+" at 35.798,3.159 h1
  text "-" at 37.703,3.159 h1
  text "+" at 61.198,3.159 h1
  text "-" at 63.103,3.159 h1
  text "+" at 86.471,3.159 h1
  text "-" at 88.376,3.159 h1
  text "2N2222" at 1.381,0.746 h1
  text "2N2222" at 16.621,0.746 h1
  text "2N2222" at 26.527,0.746 h1
  text "2N2222" at 41.767,0.746 h1
  text "2N2222" at 51.927,0.746 h1
  text "2N2222" at 67.167,0.746 h1
  text "2N2222" at 77.2,0.746 h1
  text "2N2222" at 92.44,0.746 h1
Bottom Overlay:
  text "A.I. PCB" at 16.113,97.647 h1
  text "A.I. PCB" at 41.259,97.647 h1
  text "A.I. PCB" at 66.659,97.647 h1
  text "A.I. PCB" at 91.932,97.647 h1
  text "A.I. PCB" at 16.113,77.708 h1
  text "A.I. PCB" at 41.259,77.708 h1
  text "A.I. PCB" at 66.659,77.708 h1
  text "A.I. PCB" at 91.932,77.708 h1
  text "A.I. PCB" at 16.113,57.515 h1
  text "A.I. PCB" at 41.259,57.515 h1
  text "A.I. PCB" at 66.659,57.515 h1
  text "A.I. PCB" at 91.932,57.515 h1
  text "A.I. PCB" at 15.986,37.322 h1
  text "A.I. PCB" at 41.132,37.322 h1
  text "A.I. PCB" at 66.532,37.322 h1
  text "A.I. PCB" at 91.805,37.322 h1
  text "A.I. PCB" at 16.113,16.875 h1
  text "A.I. PCB" at 41.259,16.875 h1
  text "A.I. PCB" at 66.659,16.875 h1
  text "A.I. PCB" at 91.932,16.875 h1